# Altium PCB PCB1.PcbDoc
Units mil, origin at the board's own origin, x right, y up, seen from the top; angles counter-clockwise.
Board outline 1968.42 x 1771.65 mil, 4 copper layers (Top Layer, Mid Layer 1, Mid Layer 2, Bottom Layer), stack 23.8 mil thick; 56 components, 35 nets, 255 pads, 63 vias.
Unrouted connection lines stored in the file: 42.
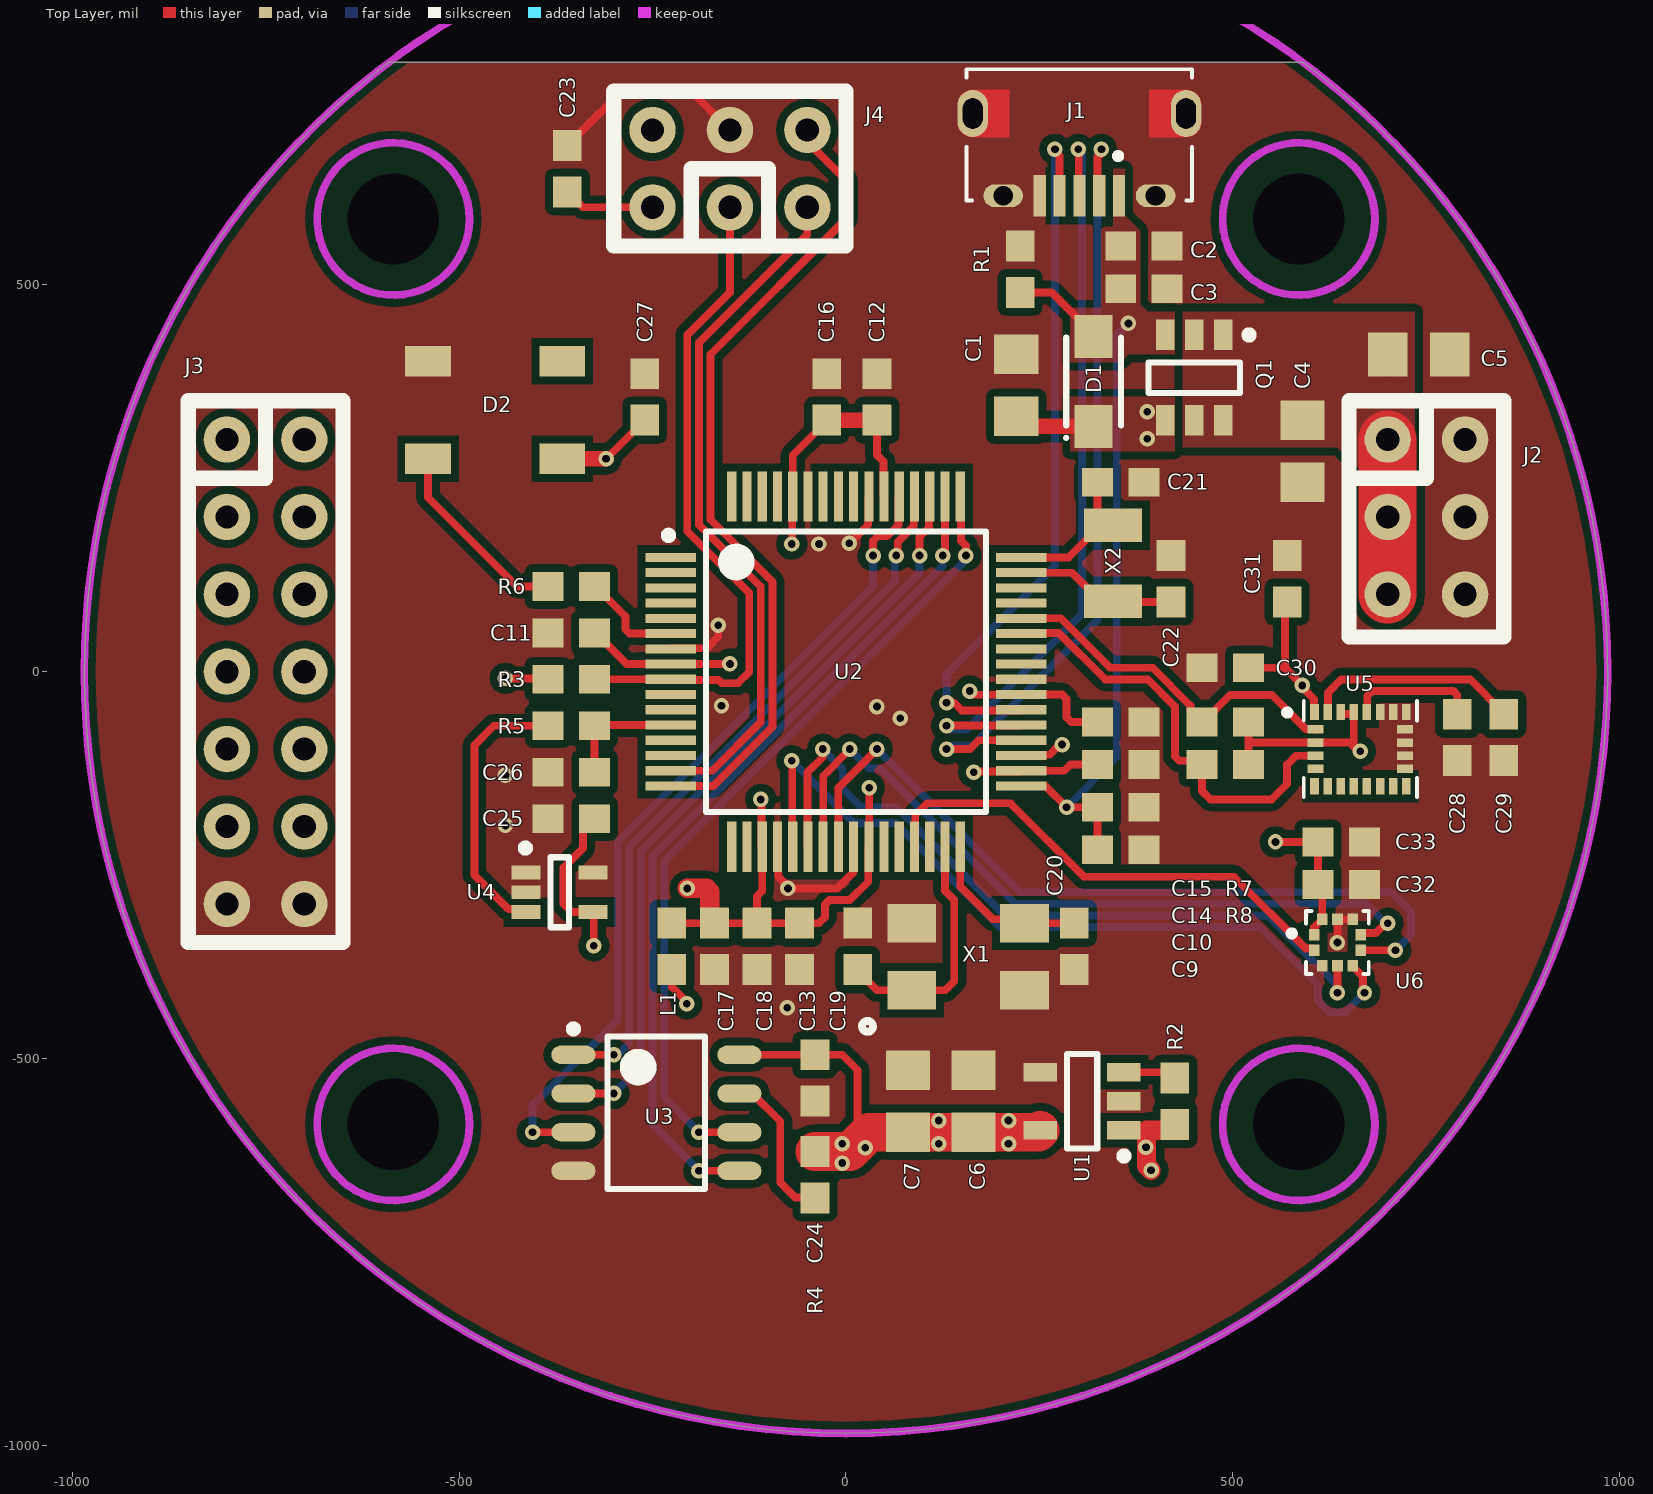
[diagram p0: Top Layer view]
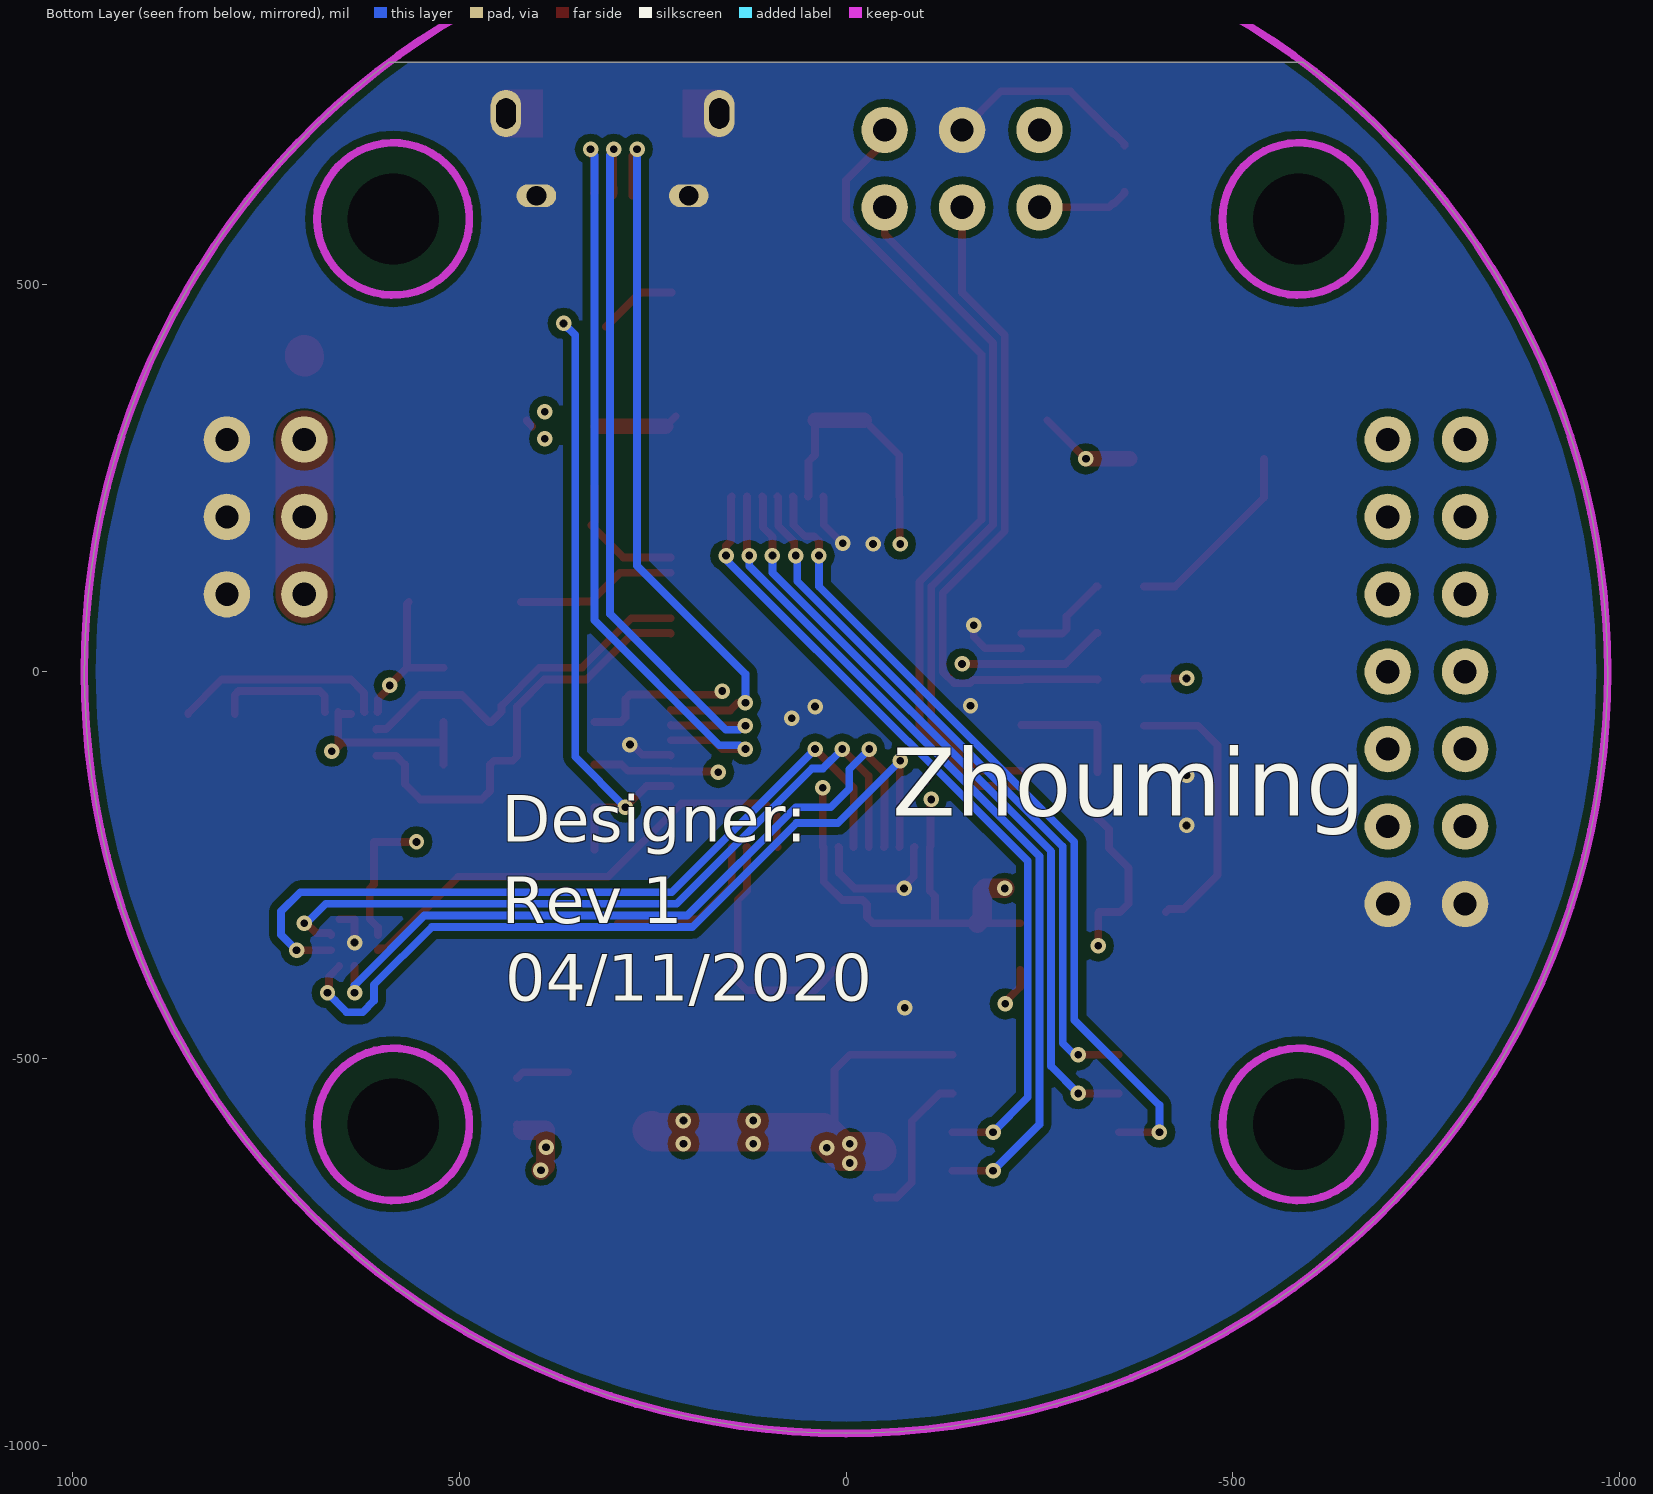
[diagram p1: Bottom Layer view, seen from below]
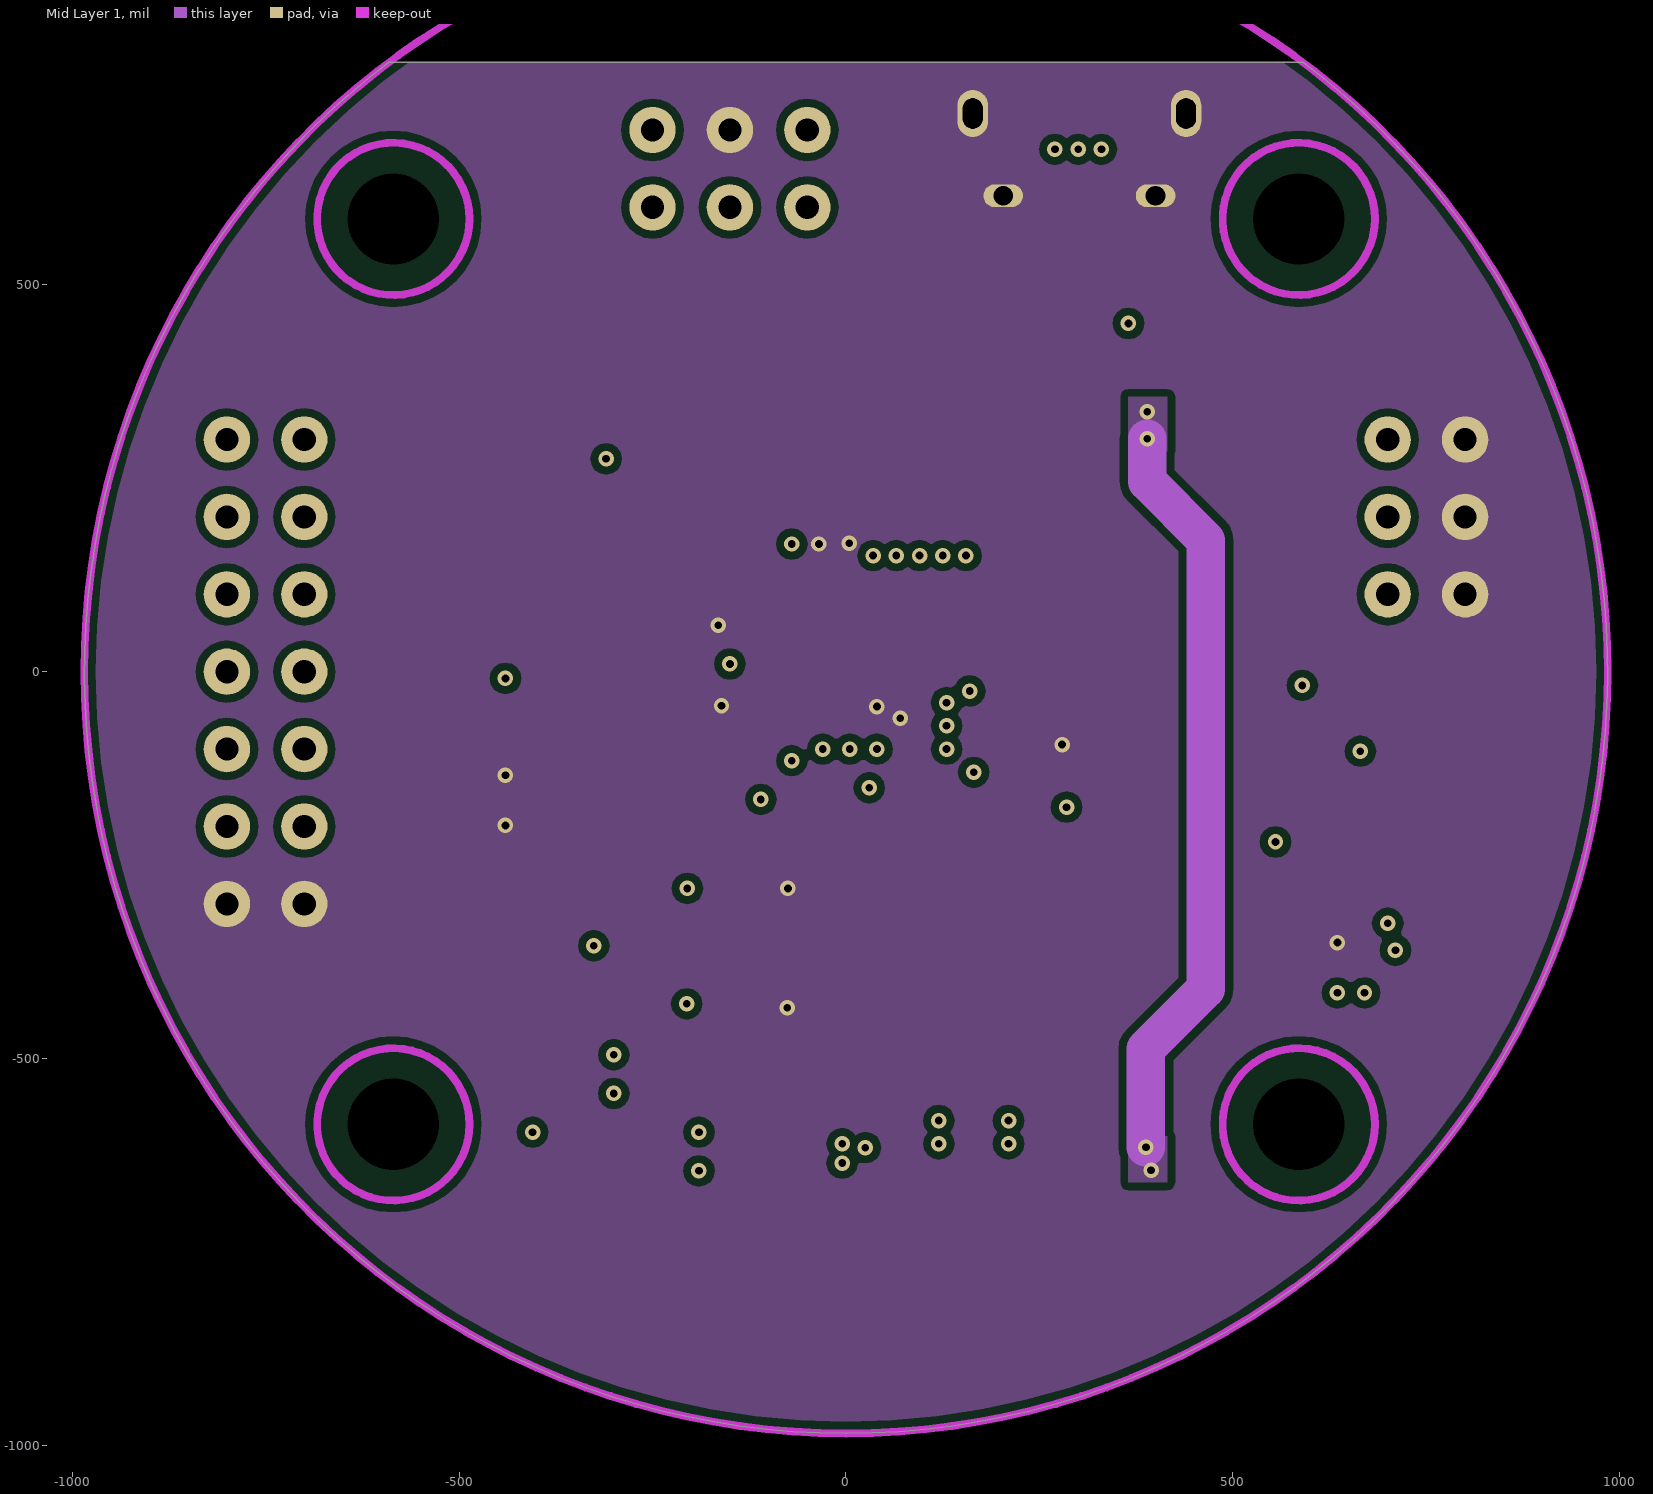
[diagram p2: Mid Layer 1]
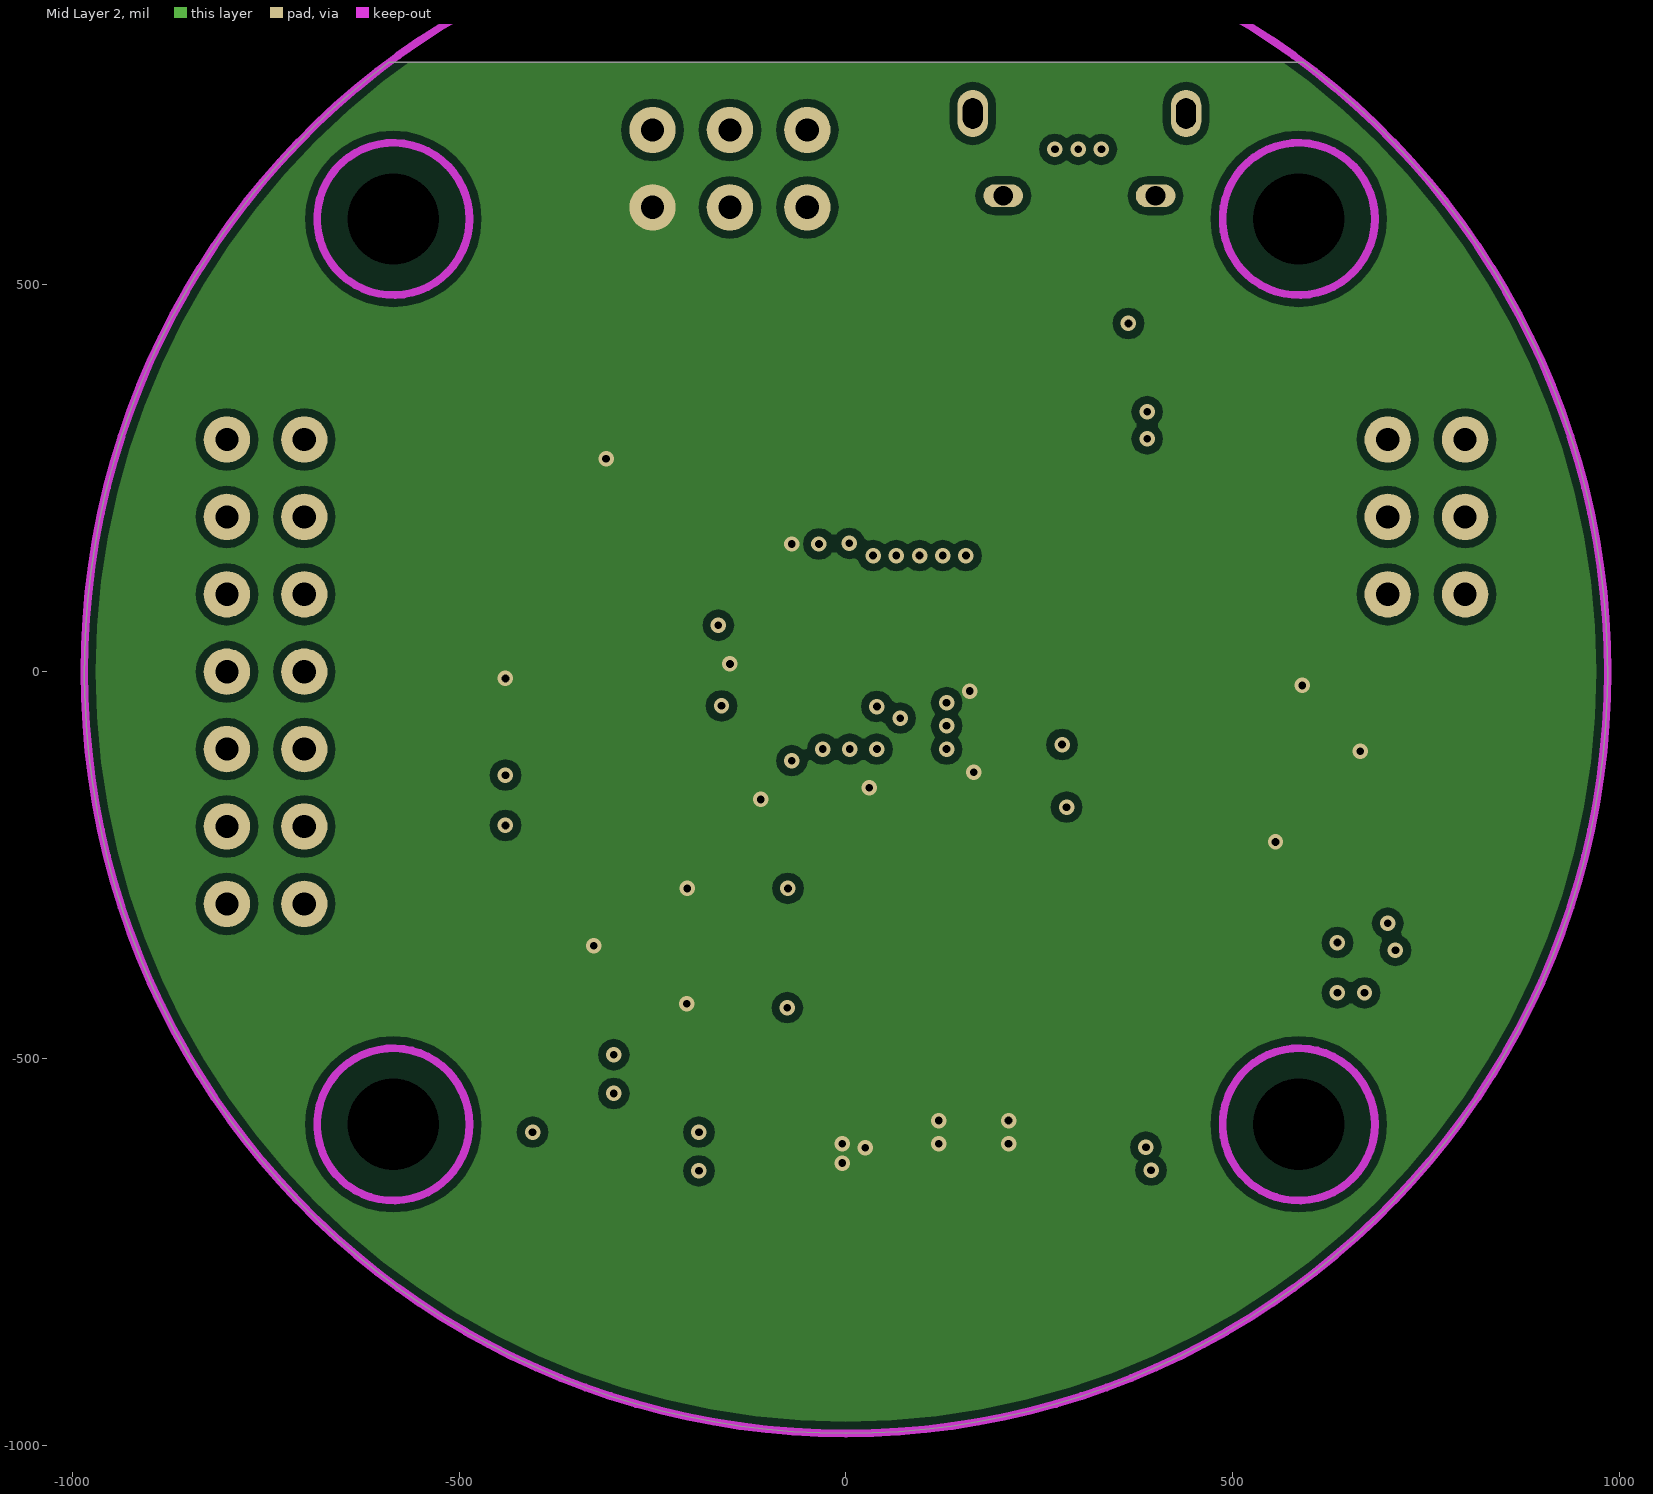
[diagram p3: Mid Layer 2]

## Layer stack, top to bottom
Top Solder: solder mask 0.4, Solder Resist, Dk 3.5
Top Layer: signal copper 1.4
Dielectric 2: prepreg 2.8, PP-006, Dk 4.1
Mid Layer 1: signal copper 1.4
Dielectric 1: dielectric 12.6, FR-4, Dk 4.8
Mid Layer 2: signal copper 1.4
Dielectric 3: prepreg 2.8, PP-006, Dk 4.1
Bottom Layer: signal copper 1.4
Bottom Solder: solder mask 0.4, Solder Resist, Dk 3.5

## Board outline
-590.55,787.4 ccw(c0,0) 590.55,787.4

## Design rules (kind name [scope] priority, off if disabled: settings)
Clearance [All] p1: gap=10 ignorepadtopadclearanceinfootprint=FALSE except(0: Arc-Hole Track-Hole SMDPad-Hole THPad-Hole Via-Hole Fill-Hole Poly-Hole Region-Hole Text-Hole; 4: SMDPad-SMDPad; 5: Arc-Arc Arc-Track Arc-SMDPad Track-Track Track-SMDPad)
DiffPairsRouting [All] p1: maxlimit=10 minlimit=10 mostfreqgap=10 toplayer_minwidth=5 toplayer_maxwidth=15 toplayer_prefwidth=10 midlayer1_minwidth=5 midlayer1_maxwidth=15 midlayer1_prefwidth=10 midlayer2_minwidth=5 midlayer2_maxwidth=15 midlayer2_prefwidth=10 bottomlayer_minwidth=5 bottomlayer_maxwidth=15 bottomlayer_prefwidth=10 maxuncoupledlength=500
HoleSize [All] p1: absolutevalues=TRUE maxlimit=200 minlimit=1 maxpercent=80.000 minpercent=20.000
MinimumSolderMaskSliver [All] p1: minsoldermaskwidth=5
PolygonConnect [All] p1: connectstyle=Direct reliefconductorwidth=10 reliefentries=4 polygonreliefangle="90 Angle" airgapwidth=10
RoomDefinition Sheet1 [InComponentClass('Sheet1')] p1 off: confinementstyle=ConfineIn formatcopy=TRUE lockcomponents=FALSE outline -3839.75,-2933.76 -3554.75,-2933.76 -3554.75,-2783.76 -3839.75,-2783.76
RoutingVias [All] p1: holewidth=10 width=50 viastyle="Through Hole" minholewidth=5 minwidth=10 maxholewidth=100 maxwidth=50
SilkToSolderMaskClearance [IsPad] p1: minsilkscreentomaskgap=5 clearancetoexposedcopper=TRUE
SolderMaskExpansion [All] p1: expansion=4
Width [All] p1: maxlimit=100 minlimit=10 preferedwidth=10 minimp=50.000000 maximp=50.000000 favimp=50.000000
26 further rules are at their usual default settings.

## Classes and differential pairs
differential pair D: +D_P -D_N

## Components (designator, comment, footprint, x,y, rotation, side; value= is the part's Value field where it differs from the comment)
C1 "Capacitor" "0805C (reflow)" 220,370 r90 top value=10uF
C2 "Capacitor" "0603C (reflow)" 385,550 r0 top value=1uF
C3 "Capacitor" "0603C (reflow)" 385,495 r0 top value=100nF
C4 "Capacitor" "0805C (reflow)" 590,285 r270 top value=10uF
C5 "Capacitor" "0805C (reflow)" 740,410 r0 top value=1uF
C6 "Capacitor" "0805C (reflow)" 165,-555 r90 top value=10uF
C7 "Capacitor" "0805C (reflow)" 80,-555 r90 top value=1uF
C9 "Capacitor" "0603C (reflow)" 355,-230 r0 top value=1uF
C10 "Capacitor" "0603C (reflow)" 355,-175 r0 top value=100nF
C11 "Capacitor" "0603C (reflow)" -355,50 r180 top value=100nF
C12 "Capacitor" "0603C (reflow)" 40,355 r90 top value=100nF
C13 "Capacitor" "0603C (reflow)" -60,-355 r270 top value=100nF
C14 "Capacitor" "0603C (reflow)" 355,-120 r0 top value=100nF
C15 "Capacitor" "0603C (reflow)" 355,-65 r0 top value=100nF
C16 "Capacitor" "0603C (reflow)" -25,355 r90 top value=100nF
C17 "Capacitor" "0603C (reflow)" -170,-355 r270 top value=1uF
C18 "Capacitor" "0603C (reflow)" -115,-355 r270 top value=100nF
C19 "Capacitor" "0603C (reflow)" 15,-355 r90 top value=22pF
C20 "Capacitor" "0603C (reflow)" 295,-355 r270 top value=22pF
C21 "Capacitor" "0603C (reflow)" 355,245 r0 top value=22pF
C22 "Capacitor" "0603C (reflow)" 420,120 r90 top value=22pF
C23 "Capacitor" "0603C (reflow)" -360,650 r90 top value=100nF
C24 "Capacitor" "0603C (reflow)" -40,-525 r90 top value=100nF
C25 "Capacitor" "0603C (reflow)" -355,-190 r0 top value=1uF
C26 "Capacitor" "0603C (reflow)" -355,-130 r0 top value=10nF
C27 "Capacitor" "0603C (reflow)" -260,355 r90 top value=100nF
C28 "Capacitor" "0603C (reflow)" 790,-85 r90 top value=10nF
C29 "Capacitor" "0603C (reflow)" 850,-85 r90 top value=100nF
C30 "Capacitor" "0603C (reflow)" 490,5 r180 top value=1uF
C31 "Capacitor" "0603C (reflow)" 570,120 r270 top value=100nF
C32 "Capacitor" "0603C (reflow)" 640,-275 r180 top value=100nF
C33 "Capacitor" "0603C (reflow)" 640,-220 r180 top value=1uF
D1 "MBR230LSFT1G" MBR230LSFT1G 320,375 r90 top
D2 "neopix" neopix -540,400.98 r180 top
J1 "10118194-0001LF" *AMPHENOL_10118194-0001LF_10118194-0001LF(Primary) 301.57,721.3 r180 top locked
J2 "6-pin header" "6-pin header" 700,300 r0 top locked
J3 "14-pin header" "14-pin header" -800,300 r0 top locked
J4 "programming header" "programming header" -250,600 r90 top locked
L1 "0603 ferrite bead" "0603R (reflow)" -225,-355 r270 top
Q1 "SI3443DVFSCT-ND" SI3443DVFSCT-ND 450,380 r270 top
R1 "Resistor" "0603R (reflow)" 225,520 r270 top value="100k OHM"
R2 "Resistor" "0603R (reflow)" 425,-555 r270 top value="10k OHM"
R3 "Resistor" "0603R (reflow)" -355,-10 r0 top value="10k OHM"
R4 "Resistor" "0603R (reflow)" -40,-650 r90 top value="10k OHM"
R5 "Resistor" "0603R (reflow)" -355,-70 r0 top value="10k OHM"
R6 "Resistor" "0603R (reflow)" -355,110 r180 top value="10k OHM"
R7 "Resistor" "0603R (reflow)" 490,-65 r0 top value="10k OHM"
R8 "Resistor" "0603R (reflow)" 490,-120 r0 top value="10k OHM"
U1 "TLV75733PDBVR" SOT23-5N 305,-555 r180 top
U2 "PIC32MZ2048EFM064-E/PT-ND" TQFP-64 0,0 r0 top locked
U3 "FLASH" 8-SOIC -245,-570 r0 top
U4 "MCP9700T-E/LTCT-ND" MCP9700T-E/LT -370,-285 r0 top
U5 "LSM9DS1TR" *PQFN43P300X350X102-24N 664.64,-100.03 r0 top
U6 "BMP388" *PQFN50P200X200X80-10N 635,-350 r0 top
X1 "12MHz" XC2731CT-ND 157.83,-368.31 r0 top
X2 "32.768 kHz" XC2292CT-ND 345,140 r90 top

## Footprints (in the part's own frame and the unit in brackets; to place one, negate y for a bottom-side part, rotate by r counter-clockwise, add the part's x,y. Pads: shape width x height; smd on the part's side, far side on the other; paste and mask are expansions set on the pad)
"6-pin header" [mil]
  round 60 hole 30: 1(0,0) 2(0,-100) 3(0,-200) 4(100,-200) 5(100,-100) 6(100,0)
  silkscreen extent -50,-255 150,50
8-SOIC [mm] "SOIC, 8-Leads, Body 4.91x3.90mm, Pitch 1.27mm, IPC Medium Density"
  oval 1.45x0.6 smd: 1(-2.725,1.905) 2(-2.725,0.635) 3(-2.725,-0.635) 4(-2.725,-1.905) 5(2.725,-1.905) 6(2.725,-0.635) 7(2.725,0.635) 8(2.725,1.905)
  silkscreen extent -2.85,-2.5 1.6,2.88, body extent -3,-2.5 3,2.5, height 1.75
"14-pin header" [mil]
  round 60 hole 30: 1(0,0) 2(0,-100) 3(0,-200) 4(0,-300) 5(0,-400) 6(0,-500) 7(0,-600) 8(100,-600) 9(100,-500) 10(100,-400) 11(100,-300) 12(100,-200) 13(100,-100) 14(100,0)
  silkscreen extent -50,-650 150,50
"0603C (reflow)" [mil]
  rrect1% 40x37 smd: 1(-30,0) 2(30,0)
  body extent -50,-19 50,19, height 38
"0603R (reflow)" [mil]
  rrect1% 40x37 smd: 1(-30,0) 2(30,0)
  body extent -50,-19 50,19, height 18
"0805C (reflow)" [mil]
  rrect1% 51x57 smd: 1(-40,0) 2(40,0)
  body extent -66,-29 66,29, height 60
*AMPHENOL_10118194-0001LF_10118194-0001LF(Primary) [mm]
  rect 0.4x1.35 smd mask+0.025: 1(-1.3,2.7) 2(-0.65,2.7) 3(0,2.7) 4(0.65,2.7) 5(1.3,2.7)
  oval 1x1.55 hole 0.65 slot 1 at 90 deg: S1(-3.5,0) S1(3.5,0)
  oval 1.3x0.75 hole 0.65: S1(-2.5,2.7) S1(2.5,2.7)
  Top Layer region: 194 vertices and 0 holes, not listed, extent -4,-0.775 -2.3,0.78
  Top Layer region: 194 vertices and 0 holes, not listed, extent 2.3,-0.78 4,0.775
  silkscreen extent -3.7,-1.45 3.7,2.85, body extent -4.02,-2.74 4.02,2.79, height 2.72
*PQFN43P300X350X102-24N [mm]
  rect 0.28x0.53 smd: 1(-1.505,1.22) 6(-1.505,-1.22) 7(-1.075,-1.22) 8(-0.645,-1.22) 9(-0.215,-1.22) 10(0.215,-1.22) 11(0.645,-1.22) 12(1.075,-1.22) 13(1.505,-1.22) 18(1.505,1.22) 19(1.075,1.22) 20(0.645,1.22) 21(0.215,1.22) 22(-0.215,1.22) 23(-0.645,1.22) 24(-1.075,1.22)
  rect 0.53x0.28 smd: 2(-1.47,0.645) 3(-1.47,0.215) 4(-1.47,-0.215) 5(-1.47,-0.645) 14(1.47,-0.645) 15(1.47,-0.215) 16(1.47,0.215) 17(1.47,0.645)
  silkscreen extent -2.5,-1.58 1.86,1.58, body extent -1.75,-1.5 1.75,1.5, height 1.4
*PQFN50P200X200X80-10N [mm]
  rect 0.35x0.38 smd: 1(-0.765,0.25) 2(-0.765,-0.25) 3(-0.5,-0.765) 4(0,-0.765) 5(0.5,-0.765) 6(0.765,-0.25) 7(0.765,0.25) 8(0.5,0.765) 9(0,0.765) 10(-0.5,0.765)
  silkscreen extent -1.6,-1.03 1.03,1.03, body extent -1,-1 1,1, height 0.8
MBR230LSFT1G [mm] "Molded Diode, 2-Leads, Body 2.70x1.65mm, IPC Medium Density"
  rect 1.4x1.25 smd: 1(-1.475,0) 2(1.475,0)
  silkscreen extent -1.9,-0.9 1.45,0.95, body extent -1.67,-0.9 1.67,0.9, height 0.98
MCP9700T-E/LT [mm] "SOT23,"
  rect 0.95x0.45 smd: 1(-1.1,0.65) 2(-1.1,0) 3(-1.1,-0.65) 4(1.1,-0.65) 5(1.1,0.65)
  silkscreen extent -1.25,-1.15 0.3,1.57, body extent -1.3,-1.12 1.3,1.12, height 1.1
neopix [mm]
  rect 1.5x1 smd: 1(0,0) 2(0,3.2) 3(-4.4,3.2) 4(-4.4,0)
"programming header" [mil]
  round 60 hole 30: 1(0,-100) 2(0,0) 3(100,-100) 4(100,-200) 5(0,-200) 6(100,0)
  silkscreen extent -50,-250 150,50
SI3443DVFSCT-ND [mm] "SOT23"
  rect 1x0.6 smd: 1(-1.4,0.95) 2(-1.4,0) 3(-1.4,-0.95) 4(1.4,-0.95) 5(1.4,0) 6(1.4,0.95)
  silkscreen extent -1.52,-1.5 0.5,1.93, body extent -1.55,-1.5 1.55,1.5, height 1.45
SOT23-5N [mm] "SOT23, 5-Leads, Body 2.90x2.80mm, Pitch 0.95mm, IPC Medium Density"
  rect 1.1x0.6 smd: 1(-1.375,0.95) 2(-1.375,0) 3(-1.375,-0.95) 4(1.375,-0.95) 5(1.375,0.95)
  silkscreen extent -1.5,-1.55 0.5,1.92, body extent -1.5,-1.53 1.5,1.53, height 1.45
TQFP-64 [mm] "TSQFP, 64-Leads, Body 10.00x10.00mm, Pitch 0.50mm, IPC Low Density"
  rect 1.65x0.3 smd: 1(-5.75,3.75) 2(-5.75,3.25) 3(-5.75,2.75) 4(-5.75,2.25) 5(-5.75,1.75) 6(-5.75,1.25) 7(-5.75,0.75) 8(-5.75,0.25) 9(-5.75,-0.25) 10(-5.75,-0.75) 11(-5.75,-1.25) 12(-5.75,-1.75) 13(-5.75,-2.25) 14(-5.75,-2.75) 15(-5.75,-3.25) 16(-5.75,-3.75) 33(5.75,-3.75) 34(5.75,-3.25) 35(5.75,-2.75) 36(5.75,-2.25) 37(5.75,-1.75) 38(5.75,-1.25) 39(5.75,-0.75) 40(5.75,-0.25) 41(5.75,0.25) 42(5.75,0.75) 43(5.75,1.25) 44(5.75,1.75) 45(5.75,2.25) 46(5.75,2.75) 47(5.75,3.25) 48(5.75,3.75)
  rect 0.3x1.65 smd: 17(-3.75,-5.75) 18(-3.25,-5.75) 19(-2.75,-5.75) 20(-2.25,-5.75) 21(-1.75,-5.75) 22(-1.25,-5.75) 23(-0.75,-5.75) 24(-0.25,-5.75) 25(0.25,-5.75) 26(0.75,-5.75) 27(1.25,-5.75) 28(1.75,-5.75) 29(2.25,-5.75) 30(2.75,-5.75) 31(3.25,-5.75) 32(3.75,-5.75) 49(3.75,5.75) 50(3.25,5.75) 51(2.75,5.75) 52(2.25,5.75) 53(1.75,5.75) 54(1.25,5.75) 55(0.75,5.75) 56(0.25,5.75) 57(-0.25,5.75) 58(-0.75,5.75) 59(-1.25,5.75) 60(-1.75,5.75) 61(-2.25,5.75) 62(-2.75,5.75) 63(-3.25,5.75) 64(-3.75,5.75)
  silkscreen extent -5.95,-4.6 4.6,4.6, body extent -6,-6 6,6, height 1.6
XC2292CT-ND [mm]
  rect 1.1x1.9 smd: 1(-1.25,0) 2(1.25,0)
  body extent -1.6,-0.75 1.6,0.75, height 0.9
XC2731CT-ND [mm]
  rect 1.6x1.25 smd: 1(-1.85,-1.1) 2(1.85,-1.1) 3(1.85,1.1) 4(-1.85,1.1)
  silkscreen extent -3.48,-2.47 -3.12,-2.11, body extent -2.5,-1.6 2.5,1.6, height 0.85

## Part data
C1 C4 C6: library part "0805 Capacitor", "Default 0805 capacitor", Voltage="100 V", Size=0805
C2 C3 C9 C10 C11 C12 C13 C14 C15 C16 C17 C18 C19 C20 C21 C22 C23 C24 C25 C26 C27 C28 C29 C30 C31 C32 C33: library part "0603 Capacitor", "Default 0603 capacitor", Voltage=100V, Size=0603
C5 C7: library part "0805 Capacitor", "Default 0805 capacitor", Voltage=100V, Size=0805
D1: "Schottky 30V 2A", ComponentLink1Description=MBR230LSFT1GOSCT-ND, ComponentLink1URL=https://www.digikey.com/product-detail/en/on-semiconductor/MBR230LSFT1G/MBR230LSFT1GOSCT-ND/1967064
J1: "USB - micro B USB 2.0 Receptacle Connector 5 Position Surface Mount, Right Angle; Through Hole", Package=None, ComponentLink1Description=10118194-0001LF, ComponentLink1URL=https://www.digikey.com/product-detail/en/amphenol-icc-fci/10118194-0001LF/609-4618-1-ND/2785382, Digi-Key_Part_Number=609-4618-1-ND, Digi-Key_Purchase_URL=https://www.digikey.com/product-detail/en/amphenol-icc-fci/10118194-0001LF/609-4618-1-ND/2785382?utm_source=snapeda&utm_medium=aggregator&utm_campaign=symbol, MF="Amphenol ICC", MP=10118194-0001LF, SnapEDA_Link=https://www.snapeda.com/parts/10118194-0001LF/Amphenol%20FCI/view-part/1413308/?ref=snap
R1 R2 R3 R4 R5 R6 R7 R8: library part "0603 Resistor", "Default 0603 resistor", Power="1/8 W", Size=0603
U3: library part MB85RS64V, ComponentLink1Description=MB85RS64V, ComponentLink1URL=https://www.digikey.com/product-detail/en/fujitsu-electronics-america-inc/MB85RS64VPNF-G-JNERE1/865-1260-1-ND/4022676
U4: "Temp sens", ComponentLink1Description=MCP9700T-E/LTCT-ND, ComponentLink1URL=https://www.digikey.com/product-detail/en/microchip-technology/MCP9700T-E-LT/MCP9700T-E-LTCT-ND/736010
U5: "Accelerometer, Gyroscope, Magnetometer, Temperature, 9 Axis Sensor I²C, SPI Output", Package="TFLGA-24 STMicroelectronics", Digi-Key_Part_Number=497-14946-1-ND, Digi-Key_Purchase_URL=https://www.digikey.com/product-detail/en/stmicroelectronics/LSM9DS1TR/497-14946-1-ND/4988079?utm_source=snapeda&utm_medium=aggregator&utm_campaign=symbol, MF=STMicroelectronics, MP=LSM9DS1TR, SnapEDA_Link=https://www.snapeda.com/parts/LSM9DS1TR/STMicroelectronics/view-part/106273/?ref=snap
U6: "Pressure Sensor 4.35PSI ~ 18.13PSI _30kPa ~ 125kPa_ Absolute 10-WFLGA", Package="WFLGA-10 Bosch Tools", Digi-Key_Part_Number=828-1079-1-ND, Digi-Key_Purchase_URL=https://www.digikey.com/product-detail/en/bosch-sensortec/BMP388/828-1079-1-ND/8322640?utm_source=snapeda&utm_medium=aggregator&utm_campaign=symbol, MF="Bosch Sensortec", MP=BMP388, SnapEDA_Link=https://www.snapeda.com/parts/BMP388/Bosch%20Sensortec/view-part/2747857/?ref=snap
X1: library part XC2731CT-ND, ComponentLink1Description=XC2731CT-ND, ComponentLink1URL=https://www.digikey.com/product-detail/en/ecs-inc/ECS-120-20-30B-AGL-TR/XC2731CT-ND/8023666
X2: library part XC2292CT-ND, ComponentLink1Description=XC2292CT-ND, ComponentLink1URL=https://www.digikey.com/product-detail/en/ecs-inc/ECX-327-CDX-1293/XC2292CT-ND/6821660
Q1: ComponentLink1Description=SI3443DVFSCT-ND, ComponentLink1URL=https://www.digikey.com/product-detail/en/on-semiconductor/SI3443DV/SI3443DVFSCT-ND/1627060
U1: ComponentLink1Description=TLV75733PDBVR, ComponentLink1URL=https://www.digikey.com/product-detail/en/texas-instruments/TLV75733PDBVR/296-50414-1-ND/9685553
U2: ComponentLink1Description=PIC32MZ2048EFM064-E/PT-ND, ComponentLink1URL=https://www.digikey.com/product-detail/en/microchip-technology/PIC32MZ2048EFM064-E-PT/PIC32MZ2048EFM064-E-PT-ND/5323570

## Free pads (board coordinates)
  round 60 hole 118.11 unplated: 0(-585,-585) 0(-585,585) 0(585,-585) 0(585,585)

## Via types
v1: diameter 20, hole 10, Top Layer to Bottom Layer, tented both sides, 63 vias

## Nets (pads, with @x,y where several pads share a name; then routed paths per layer and width w, separated by ;. In a path a pad name is that pad's centre, name@x,y a point inside that pad or via, vN(x,y) a via of type N, cw(c..) or ccw(c..) an arc to the next point about the centre after c; other vN are vias at no path point)
3V3: C6.1 C7.1 C11.1 C12.1 C13.1 C14.1 C15.1 C16.1 C17.1 C18.1 C23.1 C24.2 C25.2 C27.1 C30.1 C31.2 C32.2 C33.2 D2.3 J4.2 L1.1 L1.2 R3.1 R4.2 R7.2 R8.2 U1.5 U2.8 U2.19 U2.26 U2.34 U2.39 U2.54 U2.60 U3.8 U4.4 U5.1 U5.3 U5.22 U5.23 U6.1 U6.10 | length 3309.9
  Top Layer w10: v1(-440,-8.65) -386.35,-8.65 R3.1 ; C23.1 -360,618.5 -346.5,605 -345,605 -340,600 J4.2 ; v1(-325.87,-354.13) -325.87,-311.42 U4.4 -354.41,-310.59 -365,-300 -365,-253.19 -339.82,-228 -339.82,-203.5 -326.32,-190 C25.2 ; C11.1 -323.5,50 -283.5,10 -226.54,10 U2.8 -150.16,9.84 v1(-150,10) ; v1(-310,275) C27.1 ; L1.2 -225,-407.29 -205.87,-426.43 v1(-205.87,-429.13) ; L1.1 C17.1 C18.1 ; U3.8 C24.2 -5,-495 15,-515 15,-580 30,-595 ; v1(-110,-165) -109.13,-165.87 -109.13,-225.51 U2.19 -108.27,-283.27 -115,-290 C18.1 ; v1(-70,165) -69.45,165.55 -69.45,225.83 U2.60 -68.9,279.6 C16.1@-23.5,325 ; v1(30,-150) 30,-225.91 U2.26 28.62,-227.28 28.62,-271.38 5,-295 -21.32,-295 -27.18,-300.86 -27.18,-317.18 -35,-325 C13.1 C18.1 ; C12.1 40,280 48.31,271.69 48.31,227.28 U2.54 ; v1(160,-25) 164.76,-29.76 226.14,-29.76 U2.39 279.14,-29.53 285,-35.39 285,-59.14 290.86,-65 C15.1 ; v1(165,-130) 166.14,-128.86 225.47,-128.86 U2.34 282.05,-127.95 290,-120 C14.1 ; R8.2 520,-92.5 ; R7.2 520,-92.5 ; C30.1 567.29,5 ; v1(555,-220) C33.2 C32.2 615.32,-280.32 U6.10 604.88,-330.32 U6.1 ; C31.2@565,90 567.29,87.71 567.29,5 ; v1@588.29,-19.09 604.88,-35.68 604.88,-51.48 U5.1 ; v1@588.65,-16.35 567.29,5 ; U5.3 650.77,-91.56 661.94,-102.73 v1(664.64,-102.73) ; U5.3@607.13,-91.54 520.96,-91.54 520,-92.5 ; U5.23@639.25,-54.7 U5.22@656.18,-54.7 ; 656.18,-95.41 U5.22@656.18,-54.7 ; U5.22 U5.22@656.18,-54.7
  Top Layer w20: D2.3 v1(-310,275) ; C16.1@-23.5,325 C12.1
  Top Layer w25: v1(-205,-280) -180,-280 -176,-284 -176,-319 C17.1
  Top Layer w50: R4.2 5,-620 30,-595 C7.1 C6.1 248.27,-595 U1.5
  other v1: -5,-635 25,-615 -5,-610 120,-610 210,-610 120,-580 210,-580 589.64,-17.73
5V: C4.1 C5.1 J2.1 J2.2 J2.3 Q1.1 Q1.2 Q1.5 Q1.6 | length 203.7
  Top Layer w50: C5.1@699.5,406.5 700,407 C5.1
  Top Layer w75: J2.3 J2.2 J2.1
CS3: U2.24 U6.6 | length 1027.6
  Top Layer w10: U2.24 -9.84,-175.16 -10,-175 -10,-150.36 40,-100.36 v1(40,-100) ; U6.6 665.2,-359.92 709.92,-359.92 v1(710,-360)
  Bottom Layer w10: v1(40,-100) 225,-285 705.36,-285 730,-309.64 730,-340 v1(710,-360)
D_N: J1.2 U2.36 | length 1023
  Top Layer w10: v1(130,-100) 160,-100 171.42,-88.58 U2.36 ; J1.2@325.59,618.7 325,618.11 325,664.64 328.09,667.73 v1@328.09,673.09
  Bottom Layer w10: v1(130,-100) 132.71,-100 137.71,-95 163.64,-95 325,66.36 v1@325,667.29
  other v1: 330,675
D_P: J1.3 U2.37 | length 1008
  Top Layer w10: v1(130,-70) 130.55,-69.45 225.83,-69.45 U2.37 ; J1.3@300,618.7 J1.3@300,625 ; v1(300,675) 300.79,674.21 300.79,615.79 J1.3
  Bottom Layer w10: v1@127.29,-70 v1(130,-70) 132.71,-70 137.71,-75 155.36,-75 305,74.64 305,667.29 300,672.29 v1(300,675)
GND: C1.2 C2.2 C3.2 C4.2 C5.2 C6.2 C7.2 C9.2 C10.2 C11.2 C12.2 C13.2 C14.2 C15.2 C16.2 C17.2 C18.2 C19.2 C20.2 C21.2 C22.2 C23.2 C24.1 C25.1 C26.1 C27.2 C28.1 C29.1 C30.2 C31.1 C32.1 C33.1 D2.1 J1.5 J1.S1 J2.4 J2.5 J2.6 J3.7 J3.8 J4.3 R1.1 U1.2 U1.4 U2.7 U2.20 U2.25 U2.35 U2.40 U2.55 U2.59 U3.4 U4.1 U4.2 U4.5 U5.14 U5.15 U5.16 U5.17 U5.18 U5.19 U5.20 U6.3 U6.8 U6.9 X1.2 X1.4 | length 708.7
  Top Layer w10: C23.2 -360,681.5 -346.5,695 -345,695 -290,750 -200,750 J4.3 ; U2.7 -225.47,30.43 -179.57,30.43 -165,45 v1(-165,60) ; U2.20 -87.68,-227.28 -87.68,-264.62 -75,-277.29 v1(-75,-280) -10.94,-280 8.94,-260.13 8.94,-227.28 U2.25 ; v1(4.13,165.87) 4.69,165.87 28.62,189.8 28.62,225.47 U2.55 ; U2.35 227.28,-107.36 263.2,-107.36 276.43,-94.13 v1(279.13,-94.13) ; v1(635,-350) U6.9 U6.8
  other v1: -75.87,-434.13 -440,-198.65 -440,-133.65 70,-60 40,-45 -160.87,-44.13 -35,165
INT: U2.23 U6.7 | length 970.6
  Top Layer w10: U2.23 -29.53,-134.88 5,-100.36 v1(5,-100) ; U6.7 665.12,-339.57 667.01,-337.68 684.62,-337.68 697.29,-325 v1(700,-325)
  Bottom Layer w10: v1(5,-100) 5,-100.36 29.64,-125 43.79,-125 218.79,-300 672.29,-300 697.29,-325 v1(700,-325)
MCLR: J4.1 R3.2 U2.9 | length 866.4
  Top Layer w10: R3.2 -324.84,-9.84 U2.9 -227.28,-10.75 -164.61,-10.75 -160.36,-15 -139.64,-15 -125,-0.36 -125,101.62 -205,181.62 -205,435 -150,490 J4.1
MISO3: U2.21 U6.5 | length 1050.4
  Top Layer w10: v1(-70,-115) -69.45,-115.55 -69.45,-225.83 U2.21 ; U6.5 654.68,-380.71 668.09,-394.11 668.09,-413.09 v1(670,-415)
  Bottom Layer w10: v1(-70,-115) 10.61,-195.61 64.39,-195.61 198.79,-330 535.36,-330 610,-404.64 610,-425.36 624.64,-440 645.36,-440 660,-425.36 660,-425 v1(670,-415)
MOSI3: U2.22 U6.4 | length 975.9
  Top Layer w10: U2.22 -49.82,-225.77 -49.82,-130.18 -30,-110.36 v1(-30,-100) ; v1(635,-415) U6.4
  Bottom Layer w10: v1(-30,-100) -30,-100.36 -4.22,-126.13 -4.22,-151.13 19.64,-175 65,-175 205,-315 545,-315 635,-405
NetC1_1: C1.1 D1.1 Q1.4 R2.2 U1.1 | length 1194.3
  Top Layer w10: C1.1 C1.1@233.07,316.93 ; Q1.4@405.79,316.93 412.6,323.74 Q1.4 ; R2.2@417.6,-592.4 R2.2
  Top Layer w20: C1.1@233.07,316.93 D1.1
  Top Layer w25: v1(394.13,-644.13) 388.37,-638.37 388.37,-592.4 R2.2@417.6,-592.4
  Mid Layer 1 w10: v1(387.5,-614.52) v1@389.41,-616.43 ; v1(394.13,-644.13) v1@394.13,-641.43
  Mid Layer 1 w50: v1(387.5,-614.52) 387.5,-487.5 465,-410 465,170 389.13,245.87 v1(389.13,300.87)
  other v1: 389.13,335.87
NetC19_1: C19.1 U2.31 X1.1 | length 321.6
  Top Layer w10: C19.1 15,-386.5 40,-411.5 84.89,-411.5 X1.1 128.39,-411.61 140,-400 140,-295 127.95,-282.95 U2.31 U2.31@128.86,-227.28
NetC20_1: C20.1 U2.32 X1.3 | length 218.2
  Top Layer w10: U2.32 147.64,-277.64 190,-320 225.67,-320 X1.3 C20.1
NetC21_1: C21.1 U2.48 X2.2 | length 172.6
  Top Layer w10: U2.48 287.68,147.64 329.25,189.21 325,193.46 C21.1@325,240
NetC22_1: C22.1 U2.47 X2.1 | length 209.3
  Top Layer w10: U2.47 292.09,127.95 329.25,90.79 X2.1 345.79,90 C22.1
NetC26_2: C26.2 R5.2 U2.12 | length 159.1
  Top Layer w10: C26.2 R5.2 -323.9,-68.9 U2.12
NetC28_2: C28.2 U5.21 | length 166.9
  Top Layer w10: U5.21 673.62,-51.48 673.62,-31.38 680,-25 785,-25 790,-30 C28.2
NetC29_2: C29.2 U5.24 | length 278.8
  Top Layer w10: U5.24 622.83,-51.48 622.83,-27.17 640,-10 806.5,-10 850,-53.5 C29.2
NetD2_2: D2.2 R6.2 | length 252.6
  Top Layer w10: D2.2 -540,225 -425,110 R6.2
NetR2_1: R2.1 U1.3 | length 68.9
  Top Layer w10: U1.3 417.6,-517.6 R2.1
NetR4_1: R4.1 U3.7 | length 200.3
  Top Layer w10: U3.7 -120.98,-545 -85,-580.98 -85,-660 -65.64,-679.36 -40,-679.36 R4.1
NetR5_1: R5.1 U4.3 | length 359.7
  Top Layer w10: U4.3 -417.17,-306.73 -436.1,-306.73 -480,-262.84 -480,-95 -455,-70 R5.1
NetR6_1: R6.1 U2.6 | length 133.5
  Top Layer w10: R6.1 -323.5,110 -285,71.5 -285,55 -279.21,49.21 U2.6
NetU2_49: U2.49 U3.6 | length 1057.3
  Top Layer w10: v1(-190,-595) U3.6 ; U2.49 148.54,225.47 148.54,169.16 155,162.71 v1(155,150)
  Bottom Layer w10: v1(-190,-595) -235,-550 -235,-244.64 -80.36,-90 -79.64,-90 155,144.64 v1(155,150)
NetU2_50: U2.50 U3.5 | length 1105.1
  Top Layer w10: v1(-190,-645) U3.5 ; v1(125,150) 127.95,152.95 U2.50
  Bottom Layer w10: v1(-190,-645) -250,-585 -250,-238.43 125,136.57 v1(125,150)
NetU2_51: U2.51 U3.2 | length 992.8
  Top Layer w10: U3.2 v1(-300,-545) ; v1(95,150) 95,174.38 107.36,186.74 107.36,225.47 U2.51
  Bottom Layer w10: v1(-300,-545) -265,-510 -265,-232.22 95,127.78 v1(95,150)
NetU2_52: U2.52 U3.1 | length 937.9
  Top Layer w10: U3.1 v1(-300,-495) ; v1(65,150) 66.91,151.91 66.91,167.51 87.68,188.27 87.68,225.47 U2.52
  Bottom Layer w10: v1(-300,-495) -295,-495 -280,-480 -280,-226.01 63.09,117.08 63.09,148.09 v1(65,150) v1@64.64,150
NetU2_53: U2.53 U3.3 | length 1081.8
  Top Layer w10: v1(-405,-595) U3.3 ; v1(35,150) 35,169.14 40.86,175 53.19,175 67.99,189.8 67.99,225.47 U2.53
  Bottom Layer w10: v1@-409.14,-595 v1(-405,-595) -405,-560 -295,-450 -295,-219.79 35,110.21 v1(35,150)
PGEC1: J4.5 U2.15 | length 898.6
  Top Layer w10: U2.15 -172.95,-127.95 -110,-65 -110,110 -190,190 -190,425 -50,565 J4.5
PGED1: J4.4 U2.16 | length 1060.6
  Top Layer w10: U2.16 -171.42,-147.64 -95,-71.21 -95,116.21 -175,196.21 -175,410 0,585 0,635 -40.43,675.43 -40.43,690.43 J4.4
SCK3: U2.29 U6.2 | length 641.9
  Top Layer w10: U2.29 89.49,-225.47 89.49,-185.51 105,-170 212.47,-170 307.47,-265 501.21,-265 593.85,-357.64 602.99,-357.64 604.88,-359.53 U6.2
SCL1: R7.1 U2.44 U5.2 | length 473.7
  Top Layer w10: U2.44 277.32,68.9 341.21,5 396.21,5 445,-43.79 445,-51.5 458.5,-65 R7.1 461.5,-65 496.5,-30 550,-30 594.09,-74.09 606.61,-74.09 U5.2@607.13,-74.61
SDA1: R8.1 U2.43 U5.4 | length 565.4
  Top Layer w10: U2.43 227.17,50 275,50 335,-10 390,-10 425,-45 425,-109.14 430.86,-115 455,-115 R8.1 460,-154.14 470.86,-165 550,-165 570,-145 570,-120 581.54,-108.46 U5.4
USBID: J1.4 U2.38 | length 939
  Top Layer w10: v1(130,-40) 139.64,-40 149.64,-50 225.59,-50 U2.38 ; v1@271.91,673.09 v1(270,675) 270,672.29 275.98,666.31 J1.4
  Bottom Layer w10: v1(130,-40) 130,-3 270,137 v1(270,675)
VBUS: C2.1 C3.1 C9.1 C10.1 D1.2 J1.1 Q1.3 R1.2 U2.33 | length 926.6
  Top Layer w10: R1.2 266.02,490 D1.2@310.2,445.83 ; U2.33 257.64,-147.64 v1(285,-175) C10.1 C9.1
  Bottom Layer w10: v1(285,-175) 350,-110 350,435 v1(365,450)
pads on no net: D2.4 J3.1 J3.2 J3.3 J3.4 J3.5 J3.6 J3.9 J3.10 J3.11 J3.12 J3.13 J3.14 J4.6 U2.1 U2.2 U2.3 U2.4 U2.5 U2.10 U2.11 U2.13 U2.14 U2.17 U2.18 U2.27 U2.28 U2.30 U2.41 U2.42 U2.45 U2.46 U2.56 U2.57 U2.58 U2.61 U2.62 U2.63 U2.64 U5.5 U5.6 U5.7 U5.8 U5.9 U5.10 U5.11 U5.12 U5.13

## Polygon pours and split planes (outlines as drawn)
GND on Top Layer "GND_L01_P019" (solid, remove dead copper, pour order 19): -590.55,787.4 ccw(c0,0) 590.55,787.4
VBUS on Top Layer "VBUS_L01_P004" (solid, remove dead copper, pour order 4): 360,650 360,590 380,570 380,475 390,465 425,465 425,410 365,410 355,400 290,400 290,470 330,470 330,575 345,575 345,650
5V on Top Layer "5V_L01_P006" (solid, remove dead copper, pour order 6): 435,465 735,465 735,260 665,260 635,290 435,290
NetC1_1 on Top Layer "NETC1_1_L01_P002" (solid, remove dead copper, pour order 2): 290,355 425,355 425,285 290,285
GND on Mid Layer 1 "GND_L02_P020" (solid, remove dead copper, pour order 20): -590.55,787.4 ccw(c0,0) 590.55,787.4
NetC1_1 on Mid Layer 1 "NETC1_1_L02_P017" (solid, remove dead copper, pour order 17): 365,355 415,355 415,285 365,285
NetC1_1 on Mid Layer 1 "NETC1_1_L02_P015" (solid, remove dead copper, pour order 15): 365,-600 415,-600 415,-660 365,-660
3V3 on Mid Layer 2 "3V3_L03_P021" (solid, remove dead copper, pour order 21): -590.55,787.4 ccw(c0,0) 590.55,787.4
GND on Bottom Layer "GND_L04_P022" (solid, remove dead copper, pour order 22): -590.55,787.4 ccw(c0,0) 590.55,787.4

## Keep-outs
Keep-Out Layer:
  circle w10: c0,0 r984.25
  circle w10: c585,585 r98.43
  circle w10: c585,-585 r98.43
  circle w10: c-585,585 r98.43
  circle w10: c-585,-585 r98.43

## Silkscreen, mask and mechanical layers (free items; w line width, h text height)
Bottom Overlay:
  text "Zhouming" at -60,-215 h150
  text "Designer:" at 445,-220 h60
  text "Rev 1" at 445,-325 h60
  text "04/11/2020" at 440,-425 h60
Mechanical 2:
  circle w0.5: c-584.62,584.62 r59.06
  circle w0.5: c584.62,584.62 r59.06
  circle w0.5: c584.62,-584.62 r59.06
  circle w0.5: c-584.62,-584.62 r59.06
  lines w0.5: -590.55,787.4 ccw(c0,0) 590.55,787.4 0,787.4 -590.55,787.4